# Allegro board FT2232_17.4.brd
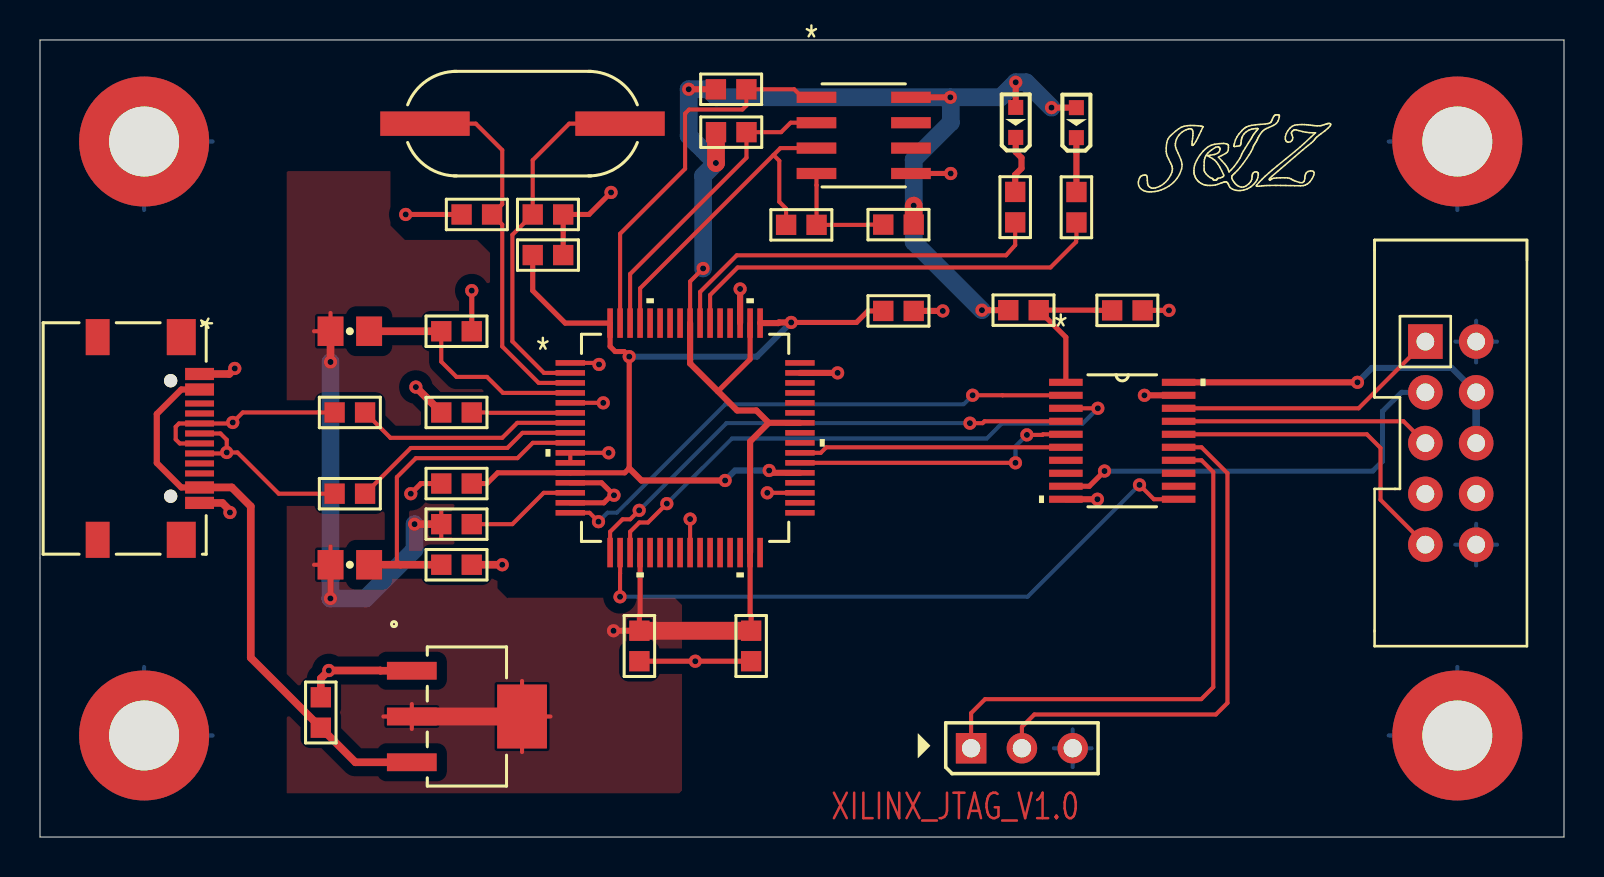
[diagram p0: board, top side]
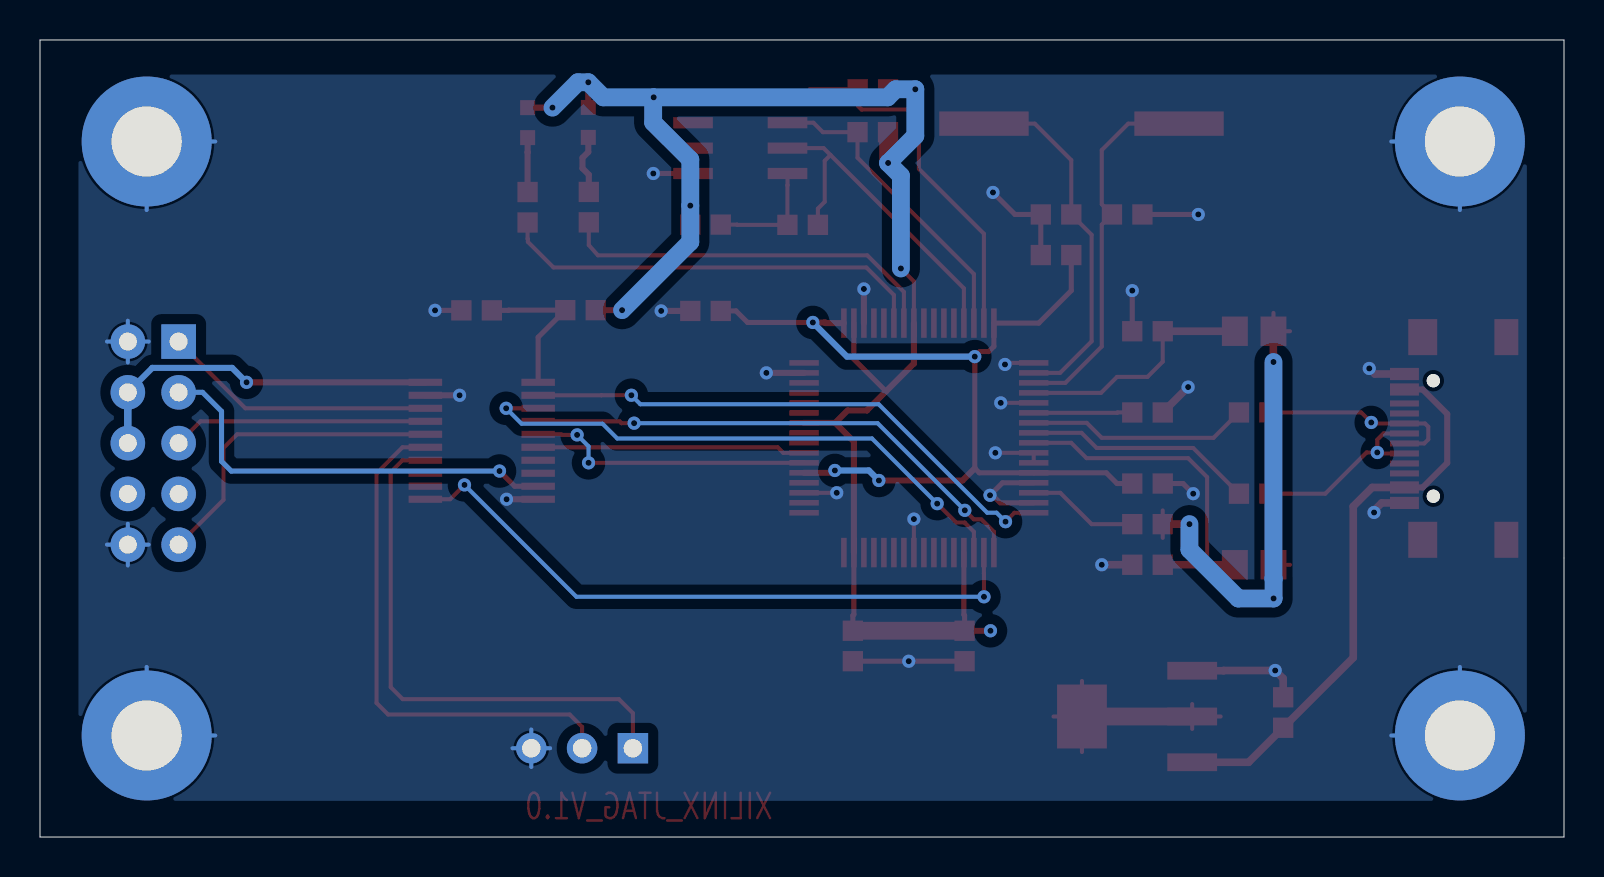
[diagram p1: board, bottom side, seen from below]

Outline 76.2 x 39.88 mm; copper layers: TOP, BOTTOM. Coordinates in mm from the lower left corner of the outline.
Outline path: 0,39.88 0,0 76.2,0 76.2,39.88 0,39.88

## Design rules (mm)
constraint set DEFAULT: min track width 0.203

## Placement (name value [footprint] x y rotation side)
C1  0.1uf  [0603]  29.97 9.56 270 top
C2  0.1uf  [0603]  14.04 6.23 90 top
C3  27pf  [0603]  25.4 31.15 0 top
C4  27pf  [0603]  21.84 31.15 180 top
C5  0.1uf  [0603]  35.56 9.56 270 top
C6  0.1uf  [0603]  20.83 25.31 180 top
C7  0.1uf  [0603]  20.83 13.62 180 top
C8  0.1uf  [0603]  42.92 26.32 0 top
C9  0.1uf  [0603]  25.4 29.12 0 top
C10  0.1uf  [0603]  20.83 17.69 180 top
J1  TYPEC-304-ACP16  [TYPEC-304-ACP16_XNP]  4.23 19.94 270 top
J2  Header 1x3  [HDR_1X3]  46.56 4.44 0 top
J3  VP  [PAD-CIR-3_5MM]  5.21 34.8 0 top
J4  VP  [PAD-CIR-3_5MM]  5.21 5.08 0 top
J5  VP  [PAD-CIR-3_5MM]  70.87 34.8 0 top
J6  VP  [PAD-CIR-3_5MM]  70.87 5.08 0 top
L1  0.1UH  [IND0805CS]  15.49 25.31 0 top
L2  0.1UH  [IND0805CS]  15.49 13.62 0 top
LED1  LED  [LED0603]  48.79 35.75 90 top
LED2  LED  [LED0603]  51.82 35.74 90 top
NOREF  -  []  55.26 30.95 0 top
R1  10k  [0603]  34.56 37.41 0 top
R2  10k  [0603]  34.56 35.27 0 top
R3  10k  [0603]  42.92 30.64 180 top
R5  2k  [0603]  38.07 30.63 0 top
R6  12k  [0603]  20.83 21.24 180 top
R7  27  [0603]  15.49 21.24 180 top
R8  27  [0603]  15.49 17.18 180 top
R9  1K  [0603]  48.76 31.51 270 top
R10  1K  [0603]  51.82 31.51 270 top
R11  1K  [0603]  20.83 15.65 180 top
R12  NC  [0603]  49.17 26.36 0 top
R13  1K  [0603]  54.37 26.35 0 top
U1  AMS1117  [SOT_AMS_ADS]  21.35 6.03 270 top
U2  FT2232HL  [64L-LQFP_FTD]  32.26 19.97 0 top
U3  93LC56BX-XSN  [SOIC8-N_MC_MCH]  41.19 35.1 0 top
U4  JTAG  [JTAG-10]  69.27 24.79 270 top
U7  SN74LV245A_PW_20  [PW20]  54.11 19.82 0 top
XTAL1  12Mhz  [XTAL_ABLS_ABR]  24.12 35.69 0 top

## Library data of the parts
C1-C10 = CAP: User Part Number: *; Tolerance: *
J1 = TYPEC-304-ACP16: User Part Number: PN; Tolerance: TOL
J2 = HDR1x3
J3-J6 = VP
L1 L2 = L: User Part Number: UPN; Tolerance: TOL
LED1 LED2 = LED
R1-R3 R5-R13 = RESISTOR: User Part Number: *; Tolerance: *
U1 = AMS1117-3P3: User Part Number: PN; Tolerance: TOL
U2 = FT2232HL: User Part Number: PN; Tolerance: TOL
U3 = 93LC56BSN: User Part Number: PN; Tolerance: TOL
U4 = JTAG
U7 = SN74LV245APWR: User Part Number: PN; Tolerance: TOL
XTAL1 = ABLS-12P000MHZ-B4-T: User Part Number: PN; Tolerance: TOL

## Footprints (pads in the part's own frame, mm; a bottom-side part is the same pattern mirrored in y, then rotated)
64L-LQFP_FTD
  rect 1.473x0.279 smd: 1(-5.74,3.75) 2(-5.74,3.25) 3(-5.74,2.75) 4(-5.74,2.25) 5(-5.74,1.75) 6(-5.74,1.25) 7(-5.74,0.75) 8(-5.74,0.25) 9(-5.74,-0.25) 10(-5.74,-0.75) 11(-5.74,-1.25) 12(-5.74,-1.75) 13(-5.74,-2.25) 14(-5.74,-2.75) 15(-5.74,-3.25) 16(-5.74,-3.75) 33(5.74,-3.75) 34(5.74,-3.25) 35(5.74,-2.75) 36(5.74,-2.25) 37(5.74,-1.75) 38(5.74,-1.25) 39(5.74,-0.75) 40(5.74,-0.25) 41(5.74,0.25) 42(5.74,0.75) 43(5.74,1.25) 44(5.74,1.75) 45(5.74,2.25) 46(5.74,2.75) 47(5.74,3.25) 48(5.74,3.75)
  rect 0.279x1.473 smd: 17(-3.75,-5.74) 18(-3.25,-5.74) 19(-2.75,-5.74) 20(-2.25,-5.74) 21(-1.75,-5.74) 22(-1.25,-5.74) 23(-0.75,-5.74) 24(-0.25,-5.74) 25(0.25,-5.74) 26(0.75,-5.74) 27(1.25,-5.74) 28(1.75,-5.74) 29(2.25,-5.74) 30(2.75,-5.74) 31(3.25,-5.74) 32(3.75,-5.74) 49(3.75,5.74) 50(3.25,5.74) 51(2.75,5.74) 52(2.25,5.74) 53(1.75,5.74) 54(1.25,5.74) 55(0.75,5.74) 56(0.25,5.74) 57(-0.25,5.74) 58(-0.75,5.74) 59(-1.25,5.74) 60(-1.75,5.74) 61(-2.25,5.74) 62(-2.75,5.74) 63(-3.25,5.74) 64(-3.75,5.74)
0603
  rect 1.016x1.016 smd: 1(-0.762,0) 2(0.762,0)
HDR_1X3
  rect 1.524x1.524 hole 0.914: 1(0,0)
  round 1.524 hole 0.914: 2(2.54,0) 3(5.08,0)
IND0805CS
  rect 1.295x1.473 smd: 1(-0.965,0) 2(0.965,0)
JTAG-10
  rect 1.73x1.73 hole 0.89: 1(0,0)
  round 1.73 hole 0.89: 2(0,2.54) 3(2.54,0) 4(2.54,2.54) 5(5.08,0) 6(5.08,2.54) 7(7.62,0) 8(7.62,2.54) 9(10.16,0) 10(10.16,2.54)
LED0603
  rect 0.75x0.75 smd: 1(0.75,0) 2(-0.75,0)
PAD-CIR-3_5MM
  round 6.5 hole 3.5: 1(0,0)
PW20
  rect 1.676x0.356 smd: 1(-2.819,2.925) 2(-2.819,2.275) 3(-2.819,1.625) 4(-2.819,0.975) 5(-2.819,0.325) 6(-2.819,-0.325) 7(-2.819,-0.975) 8(-2.819,-1.625) 9(-2.819,-2.275) 10(-2.819,-2.925) 11(2.819,-2.925) 12(2.819,-2.275) 13(2.819,-1.625) 14(2.819,-0.975) 15(2.819,-0.325) 16(2.819,0.325) 17(2.819,0.975) 18(2.819,1.625) 19(2.819,2.275) 20(2.819,2.925)
SOIC8-N_MC_MCH
  rect 1.981x0.559 smd: 1(-2.362,1.905) 2(-2.362,0.635) 3(-2.362,-0.635) 4(-2.362,-1.905) 5(2.362,-1.905) 6(2.362,-0.635) 7(2.362,0.635) 8(2.362,1.905)
SOT_AMS_ADS
  rect 0.889x2.489 smd: 1(-2.29,-2.756) 2(0,-2.756) 3(2.29,-2.756)
  rect 3.2x2.489 smd: 4(0,2.756)
TYPEC-304-ACP16_XNP
  rect 1.803x1.448 smd: (-5.07,2.83) (5.07,2.83)
  rect 1.803x1.194 smd: (-5.07,-1.35) (5.07,-1.35)
  round 0.66 hole 0.66 unplated: (-2.89,2.3) (2.89,2.3)
  rect 0.61x1.448 smd: A1-B12(-3.225,3.745) A4-B9(-2.45,3.745) B1-A12(3.225,3.745) B4-A9(2.45,3.745)
  rect 0.305x1.448 smd: A5(-1.25,3.745) A6(-0.25,3.745) A7(0.25,3.745) A8(1.25,3.745) B5(1.75,3.745) B6(0.75,3.745) B7(-0.75,3.745) B8(-1.75,3.745)
XTAL_ABLS_ABR
  rect 4.47x1.219 smd: 1(-4.877,0) 2(4.877,0)

## Nets
+1V8: C8.1 C9.1 C10.1 U2.12 U2.37 U2.49(VREGOUT) U2.64
+3.3V: C1.1 C5.1 L1.1 L2.1 LED1.1 LED2.1 R1.1 R2.1 R3.1 R11.2 R12.1 U1.2(VOUT) U1.4 U2.20 U2.31 U2.42 U2.50 U2.56 U3.8
+5V: C2.1 J1.A4-B9 J1.B4-A9(VBUS_1) U1.3
GND: C1.2 C2.2 C3.2 C4.2 C5.2 C6.1 C7.1 C8.2 C9.2 C10.2 J1.A1-B12 J1.B1-A12 J2.3 J3.1 J4.1 J5.1 J6.1 R6.2 R13.2 U1.1 U2.1 U2.5 U2.10 U2.11 U2.13 U2.15 U2.25 U2.35 U2.47 U2.51 U3.5(VSS) U4.2 U4.10 U7.10 U7.19
CTS: U2.41
DTR: U2.43
FPGA_3.3V: U4.4 U4.6(VIO) U7.20(VCC)
FPGA_TCK: U4.1 U7.18
FPGA_TDI: U4.9 U7.16
FPGA_TDO: U4.3 U7.9
FPGA_TMS: U4.5 U7.17
RTS: U2.40
RX: U2.39 U7.6
TCK: U2.16 U7.2
TDI: U2.17 U7.4
TDO: U2.18 U7.11
TMS: U2.19 U7.3
TX: U2.38 U7.5
USB_DM: J1.A7 J1.B7 R7.2
USB_DP: J1.A6 J1.B6 R8.2
USER_RX: J2.1 U7.14
USER_TX: J2.2 U7.15
N00903: C3.1 U2.2 XTAL1.2
N00907: C4.1 U2.3 XTAL1.1
N01158: C6.2 L1.2 U2.4
N01265: R6.1 U2.6
N01321: R7.1 U2.7
N01386: R8.1 U2.8
N02396: C7.2 L2.2 U2.9
N02607: R11.1 U2.14
N05569: R10.2 U2.54
N05573: R9.2 U2.55
N06087: R1.2 U2.63 U3.1
N06373: R2.2 U2.62 U3.2
N06455: R5.1 U2.61 U3.3
N06533: R3.2 R5.2 U3.4
N07690: LED1.2(CATHODE) R9.1
N09895: LED2.2(CATHODE) R10.1
N19172: R12.2 R13.1 U7.1

Pads without a net: J1 A5 A8 B5 B8; U2 21 22 23 24 26 27 28 29 30 32 33 34 36 44 45 46 48 52 53 57 58 59 60; U3 6 7; U4 7 8; U7 7 8 12 13

## Via types
v1: diameter 0.66, hole 0.305, TOP to BOTTOM, 53 vias

## Routing (per net, layer and track width the routed paths; a pad name or vN(x,y) marks a point on that pad's centre or on a via; arc(x,y) is an arc through that point)
+1V8: length 46.7
  TOP w0.254: C9.1 24.64,27.34 26.26,25.71 U2.64 28.51,24.54 28.76,24.29 29.21,24.29 v1(29.46,24.04) 29.46,18.45 29.24,18.22 U2.12 22.89,18.22 22.35,17.69 C10.1 ; C8.1 41.4,26.32 40.82,25.74 v1(37.56,25.74)
  TOP w0.305: v1(34.26,17.84) 30.07,17.84 29.46,18.45 ; v1(37.56,25.74) 36.95,25.74 36.92,25.71 U2.49 ; v1(36.46,18.34) 36.57,18.22 U2.37
  BOTTOM w0.305: v1(36.46,18.34) 34.76,18.34 v1(34.26,17.84) ; v1(29.46,24.04) 35.85,24.04 v1(37.56,25.74)
+3.3V: length 129.8
  TOP w0.203: 20.06,14.97 R11.2 20.06,16.34 ; 14.53,14.54 L2.1 13.7,13.62 ; v1(33.16,28.45) 32.51,27.8 U2.56 ; 14.53,26.22 L1.1 13.7,25.31 ; 17.17,6.03 U1.2 ; U1.2 18.59,5.41 ; U1.2 18.59,6.65 ; U1.4 25.52,6.03 ; U1.4 24.1,7.81 ; U1.4 24.1,4.25
  TOP w0.254: 33.9,22.3 35.51,23.91 U2.50 ; C5.1 35.56,11.08 35.51,11.13 U2.31 ; U2.20 30.01,11.12 29.97,11.08 C1.1
  TOP w0.305: LED1.1 v1(48.79,37.76) ; 36.44,20.72 35.51,19.79 U2.31 ; 36.44,20.72 U2.42 ; 36.44,20.72 35.82,21.34 34.86,21.34 32.51,23.69 U2.56 ; L2.1 14.53,11.94 v1(14.52,11.94) ; LED2.1 v1(50.58,36.49) ; U3.8 v1(45.52,37.01) ; C1.1 v1(28.68,10.32) ; R12.1 v1(47.1,26.36) ; v1(32.44,37.41) R1.1
  TOP w0.381: v1(14.53,23.77) L1.1 ; R11.2 v1(18.73,15.65)
  TOP w0.889: R2.1 33.8,33.73 v1(33.79,33.72) ; R3.1 v1(43.69,31.59) ; U1.2 U1.4 ; C5.1 C1.1
  BOTTOM w0.889: v1(45.52,37.01) 45.54,36.98 45.54,35.75 43.69,33.89 v1(43.69,31.59) 43.69,29.77 v1(47.1,26.36) ; v1(45.52,37.01) 33.82,37.01 33.41,37.41 v1(32.44,37.41) 32.44,35.08 v1(33.79,33.72) 33.16,33.08 v1(33.16,28.45) ; v1(45.52,37.01) 48.03,37.01 v1(48.79,37.76) 49.31,37.76 v1(50.58,36.49) ; v1(18.73,15.65) 18.73,14.38 16.28,11.94 v1(14.52,11.94) 14.52,12.91 14.53,12.92 v1(14.53,23.77)
+5V: length 28.5
  TOP w0.305: J1.A4-B9 7.06,22.39 5.84,21.17 5.84,18.71 7.06,17.49 J1.B4-A9
  TOP w0.381: J1.B4-A9 9.59,17.49 10.54,16.54 10.54,8.97 C2.1 15.77,3.74 U1.3
GND: length 94.5
  TOP w0.203: U2.11 U2.10 v1(28.43,19.22) ; U2.5 v1(28.16,21.72) ; U2.1 27.87,23.72 v1(27.95,23.64) ; U2.25 v1(32.51,15.91) ; U2.35 v1(36.36,17.22)
  TOP w0.254: U2.15 28.19,16.72 28.57,17.1 v1(28.7,17.1) 28.08,17.72 U2.13 ; U3.5 v1(45.53,33.2) ; C4.2 v1(18.29,31.15) ; C5.2 v1(32.76,8.8) C1.2 ; v1(28.55,32.25) 27.45,31.15 C3.2 C9.2 ; v1(18.54,17.18) 19.05,17.69 C10.2 ; C6.1 v1(21.59,27.34) ; R13.2 v1(56.45,26.35)
  TOP w0.305: U7.10 v1(52.87,16.9) ; v1(35.01,27.42) U2.51 ; U2.47 v1(39.88,23.22) ; U7.19 v1(55.22,22.1) ; C8.2 v1(45.14,26.32)
  TOP w0.381: C7.1 v1(23.11,13.62) ; C2.2 14.04,7.93 v1(14.44,8.33) 17.02,8.33 17.03,8.32 U1.1 ; J1.A1-B12 9.46,23.17 v1(9.74,23.44) ; R6.2 v1(18.79,22.51) ; v1(9.5,16.24) 9.5,16.33 9.12,16.72 J1.B1-A12
  BOTTOM w0.203: 67.44,34.8 J5.1 70.87,31.37 ; 50.7,4.44 J2.3 ; J2.3 52.58,4.44 ; J2.3 51.64,3.5 ; J2.3 51.64,5.38 ; 8.64,5.08 J4.1 5.21,8.51 ; 71.81,23.74 U4.2 ; U4.2 71.81,25.83 ; U4.2 70.76,24.79 ; U4.2 72.85,24.79 ; U4.10 72.85,14.63 ; U4.10 71.81,15.67 ; U4.10 70.76,14.63 ; U4.10 71.81,13.58 ; 70.87,8.51 J6.1 67.44,5.08 ; 8.64,34.8 J3.1 5.21,31.37
FPGA_3.3V: length 18.2
  TOP w0.305: U7.20 v1(65.87,22.75)
  BOTTOM w0.305: U4.4 70.58,23.47 66.6,23.47 v1(65.87,22.75)
  BOTTOM w0.381: U4.4 U4.6
FPGA_TCK: length 13.7
  TOP w0.203: U4.1 65.93,21.45 U7.18
FPGA_TDI: length 16.1
  TOP w0.203: U7.16 66.34,20.15 67.03,19.47 67.03,16.87 U4.9
FPGA_TDO: length 21.4
  TOP w0.254: v1(53.23,18.31) 52.46,17.55 U7.9
  BOTTOM w0.254: v1(53.23,18.31) 66.64,18.31 67.12,18.8 67.12,21.3 68.07,22.25 U4.3
FPGA_TMS: length 12.8
  TOP w0.203: U4.5 68.18,20.8 U7.17
RX: length 13.4
  TOP w0.203: U7.6 39.31,19.5 39.04,19.22 U2.39
TCK: length 27.6
  TOP w0.203: v1(46.63,22.1) 48.13,22.1 48.13,22.1 U7.2 ; U2.16 27.48,16.22 v1(27.92,15.78)
  BOTTOM w0.203: v1(46.63,22.1) 46.18,21.65 34.27,21.65 28.84,16.23 28.37,16.23 v1(27.92,15.78)
TDI: length 26.1
  TOP w0.203: U2.17 28.51,15.27 29.13,15.9 29.51,15.9 v1(29.96,16.34) ; U7.4 47.22,20.8 47.13,20.71 v1(46.49,20.71)
  BOTTOM w0.203: v1(29.96,16.34) 34.32,20.71 v1(46.49,20.71)
TDO: length 32.8
  TOP w0.203: U7.11 55.69,16.9 v1(54.98,17.62) ; U2.18 29.01,13.19 29,13.19 v1(29,12.02)
  BOTTOM w0.203: v1(29,12.02) 49.38,12.02 v1(54.98,17.62)
TMS: length 28.6
  TOP w0.203: v1(31.34,16.68) 30.4,15.74 29.97,15.74 29.51,15.27 U2.19 ; U7.3 v1(52.89,21.45)
  BOTTOM w0.203: v1(52.89,21.45) 52.12,20.68 48.07,20.68 47.34,19.94 34.6,19.94 v1(31.34,16.68)
TX: length 14.4
  TOP w0.203: v1(49.34,20.12) 50.12,20.12 50.15,20.15 U7.5 ; U2.38 v1(48.77,18.72)
  BOTTOM w0.203: v1(48.77,18.72) 48.77,19.55 v1(49.34,20.12)
USB_DM: length 10.2
  TOP w0.203: R7.2 10.14,21.24 v1(9.64,20.74) 9.59,20.69 J1.B7 6.95,20.69 6.78,20.53 6.78,19.89 6.99,19.69 J1.A7
USB_DP: length 9.8
  TOP w0.203: J1.B6 9.29,19.19 v1(9.34,19.24) ; v1(9.34,19.24) 9.34,19.87 9.02,20.19 J1.A6 ; v1(9.34,19.24) 9.87,19.24 11.94,17.18 R8.2
USER_RX: length 27.1
  TOP w0.203: J2.1 46.56,6.2 47.25,6.9 58.06,6.9 58.66,7.5 58.66,18.26 58.07,18.85 U7.14
USER_TX: length 26.3
  TOP w0.203: J2.2 49.1,5.51 49.72,6.13 58.8,6.13 59.37,6.71 59.37,18.2 58.07,19.5 U7.15
N00903: length 18.2
  TOP w0.203: XTAL1.2 26.46,35.69 24.64,33.87 C3.1 23.62,30.13 23.62,24.8 25.2,23.22 U2.2
N00907: length 18.8
  TOP w0.203: XTAL1.1 21.79,35.69 23.11,34.37 23.11,31.66 C4.1 23.11,30.64 23.11,24.54 24.93,22.72 U2.3
N01158: length 12.2
  TOP w0.203: C6.2 20.06,23.78 20.83,23.02 22.35,23.02 23.15,22.22 U2.4
  TOP w0.381: C6.2 L1.2
N01265: length 4.9
  TOP w0.203: U2.6 22.34,21.22 22.32,21.24 R6.1
N01321: length 11.1
  TOP w0.203: U2.7 23.86,20.72 23.11,19.97 17.52,19.97 R7.1
N01386: length 11.5
  TOP w0.203: R8.1 18.54,19.46 23.37,19.46 24.12,20.22 U2.8
N02396: length 17.5
  TOP w0.203: 18.03,13.62 17.84,13.81 17.84,18.01 18.79,18.96 23.87,18.96 24.64,19.72 U2.9
  TOP w0.381: L2.2 C7.2
N02607: length 5.6
  TOP w0.203: R11.1 23.62,15.65 25.19,17.22 U2.14
N05569: length 21.8
  TOP w0.203: R10.2 51.82,29.93 51.81,29.92 51.81,29.78 50.53,28.5 34.88,28.5 33.51,27.12 U2.54
N05573: length 19.4
  TOP w0.203: R9.2 48.76,29.62 48.3,29.1 34.84,29.1 33.01,27.27 U2.55
N06087: length 19.5
  TOP w0.203: U3.1 38.11,37.01 37.71,37.41 R1.2 35.32,36.6 35.12,36.4 32.46,36.4 32.26,36.2 32.26,33.43 29.01,30.18 U2.63
N06373: length 15.7
  TOP w0.203: U2.62 29.51,28.17 35.32,33.99 R2.2 37.06,35.27 37.53,35.74 U3.2
N06455: length 17.2
  TOP w0.203: U2.61 30.01,27.45 36.68,34.12 ; 36.68,34.12 37.02,34.47 U3.3 ; 36.68,34.12 36.96,33.83 36.96,31.78 37.3,31.44 R5.1
N06533: length 5.9
  TOP w0.203: U3.4 38.82,32.61 38.83,32.61 R5.2 41.34,30.63 41.35,30.64 R3.2
N07690: length 3
  TOP w0.305: R9.1 48.76,33.14 49.08,33.45 49.08,33.98 48.79,34.27 LED1.2
N09895: length 2.7
  TOP w0.305: R10.1 51.82,34.26 51.82,34.26 LED2.2
N19172: length 7.8
  TOP w0.254: U7.1 51.29,25 R12.2 52.76,26.36 52.77,26.35 R13.1

## Copper pours and planes (outline as drawn; the poured copper is in the pictures)
+3.3V on TOP: 12.34,33.26 12.34,2.22 12.37,2.19 31.96,2.19 32.1,2.32 32.1,11.61 31.73,11.97 23.4,11.97 23.37,11.94 22.87,12.44 22.87,28.85 21.85,29.87 18.25,29.87 17.52,30.6 17.52,33.32 12.4,33.32 ; 2 cut-outs
GND on BOTTOM: 1.86,38.15 74.22,38.15 74.28,38.09 74.28,1.81 1.86,1.81 ; 7 cut-outs

## Text on the board
TOP: XILINX_JTAG_V1.0
DISPLAY_TOP: FIGURE | FINISHED_SIZE | 12.0 | 35.04 | 36.0 | 137.8 | 26.0 | DRILL CHART: TOP to BOTTOM | ALL UNITS ARE IN MILS | TOLERANCE_DRILL | +0.0/-0.0 | +3.0/-3.0 | PLATED | NON-PLATED | QTY | 53 | 10 | 3 | 4 | 2
